# Altium PCB PCB_V0.0.PcbDoc
Units mm, origin at the board's own origin, x right, y up, seen from the top; angles counter-clockwise.
Board outline 105 x 34 mm, 2 copper layers (Top Layer, Bottom Layer); 26 components, 9 nets, 129 pads, 48 vias.
Unrouted connection lines stored in the file: 14.
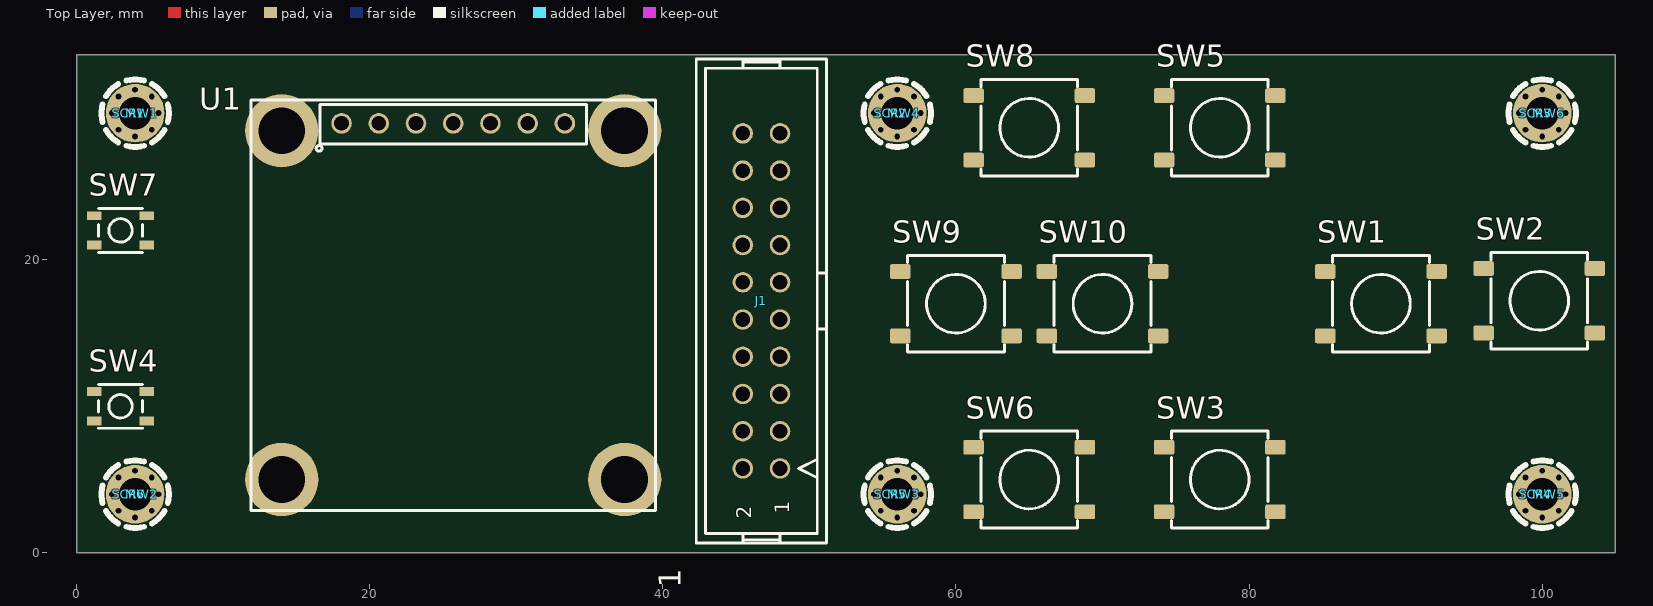
[diagram p0: Top Layer view]
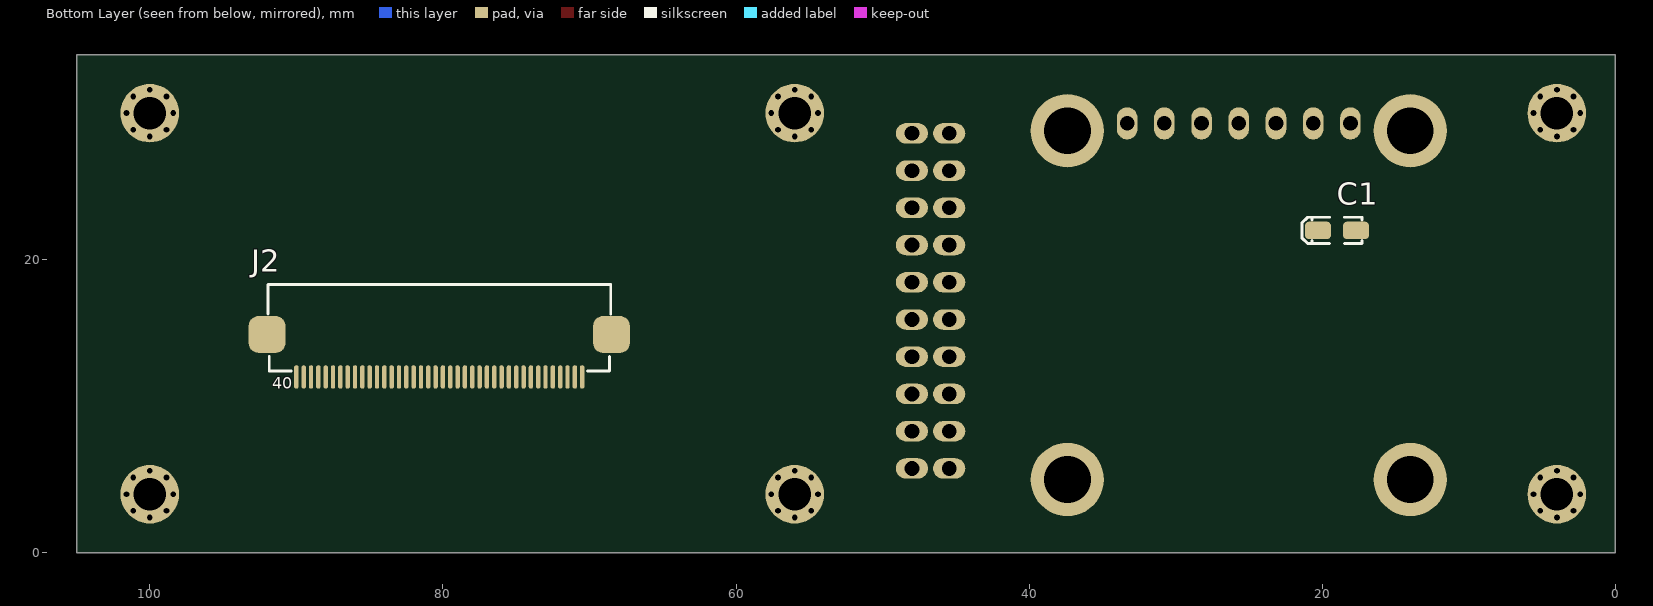
[diagram p1: Bottom Layer view, seen from below]

## Layer stack, top to bottom
Top Solder: solder mask 0.0102, Solder Resist, Dk 3.5
Top Layer: signal copper 0.0356
Dielectric 1: dielectric 0.32, FR-4, Dk 4.8
Bottom Layer: signal copper 0.0356
Bottom Solder: solder mask 0.0102, Solder Resist, Dk 3.5

## Board outline
0,0 0,34 105,34 105,0

## Design rules (kind name [scope] priority, off if disabled: settings)
Clearance [All] p1: gap=0.254 ignorepadtopadclearanceinfootprint=FALSE except(0: Arc-Hole Track-Hole SMDPad-Hole THPad-Hole Via-Hole Fill-Hole Poly-Hole Region-Hole Text-Hole)
PolygonConnect [All] p1: connectstyle=Relief reliefconductorwidth=0.254 reliefentries=4 polygonreliefangle="90 Angle" airgapwidth=0.254
RoutingVias [All] p1: holewidth=0.711 width=1.27 viastyle="Through Hole" minholewidth=0.711 minwidth=1.27 maxholewidth=0.711 maxwidth=1.27
SolderMaskExpansion [All] p1: expansion=0.102 istentingtop=FALSE
Width [All] p1: maxlimit=0.254 minlimit=0.254 preferedwidth=0.254
30 further rules are at their usual default settings.

## Classes and differential pairs
component class "screw and Hole": M1 M2 M3 M4 M5 M6 SCRW1 SCRW2 SCRW3 SCRW4 SCRW5 SCRW6
component class "On Board Terminal": J2
component class JTAG: J1
component class Disp: C1 SW1 SW2 SW5 SW6 SW8 SW10 U1

## Components (designator, comment, footprint, x,y, rotation, side; value= is the part's Value field where it differs from the comment)
C1 "2.2uF-10V" C_TN_3216 19,22 r180 bottom
J1 "IDC_2X10" IDC_2X10 46.73,17.19 r90 top
J2 "FPC50 40" FPC50_40 80.25,12 r180 bottom
M1 "DNP/MH" SCMH_M2 4,30 r0 top
M2 "DNP/MH" SCMH_M2 56,30 r0 top
M3 "DNP/MH" SCMH_M2 100,30 r0 top
M4 "DNP/MH" SCMH_M2 100,4 r0 top
M5 "DNP/MH" SCMH_M2 56,4 r0 top
M6 "DNP/MH" SCMH_M2 4,4 r0 top
SCRW1 "SCREW" SCRW_CHSH_PHLIPS_M2X4 4,30 r0 top
SCRW2 "SCREW" SCRW_CHSH_PHLIPS_M2X4 4,4 r0 top
SCRW3 "SCREW" SCRW_CHSH_PHLIPS_M2X4 56,4 r0 top
SCRW4 "SCREW" SCRW_CHSH_PHLIPS_M2X4 56,30 r0 top
SCRW5 "SCREW" SCRW_CHSH_PHLIPS_M2X4 100,4 r90 top
SCRW6 "SCREW" SCRW_CHSH_PHLIPS_M2X4 100,30 r90 top
SW1 "PUSHBUTTON" SWPBS_SPDT_6X6X4 89,17 r0 top
SW2 "PUSHBUTTON" SWPBS_SPDT_6X6X4 99.8,17.2 r0 top
SW3 "PUSHBUTTON" SWPBS_SPDT_6X6X4 78,5 r0 top
SW4 "PUSHBUTTON" SWPBS_SPDT_3X3TS 3,10 r0 top
SW5 "PUSHBUTTON" SWPBS_SPDT_6X6X4 78,29 r0 top
SW6 "PUSHBUTTON" SWPBS_SPDT_6X6X4 65,5 r0 top
SW7 "PUSHBUTTON" SWPBS_SPDT_3X3TS 3,22 r0 top
SW8 "PUSHBUTTON" SWPBS_SPDT_6X6X4 65,29 r0 top
SW9 "PUSHBUTTON" SWPBS_SPDT_6X6X4 60,17 r0 top
SW10 "PUSHBUTTON" SWPBS_SPDT_6X6X4 70,17 r0 top
U1 "OLED_SSD1306" OLED_SSD1306_64_SPI 25.702,29.3 r0 top

## Footprints (in the part's own frame and the unit in brackets; to place one, negate y for a bottom-side part, rotate by r counter-clockwise, add the part's x,y. Pads: shape width x height; smd on the part's side, far side on the other; paste and mask are expansions set on the pad)
C_TN_3216 [mm] "CAPACITOR, TAN A, 1206P, 3.2x1.6mm"
  rrect50% 1.8x1.2 smd mask+0.075: 1(-1.3,0) 2(1.3,0)
  Top Layer pour cut-out: -0.762,0.9 0.762,0.9 0.762,-0.9 -0.762,-0.9
  silkscreen extent -2.4,-0.9 1.7,0.9, body extent -1.7,-0.9 1.7,0.9, height 1.7
FPC50_40 [mm] "FPC, pitch: 0.5mm, FH12-40S-0.5SH, molex 54132-4062   (www.Smartw.ir)"
  oval 0.3x1.6 smd mask+0.05: 1(9.75,0) 2(9.25,0) 3(8.75,0) 4(8.25,0) 5(7.75,0) 6(7.25,0) 7(6.75,0) 8(6.25,0) 9(5.75,0) 10(5.25,0) 11(4.75,0) 12(4.25,0) 13(3.75,0) 14(3.25,0) 15(2.75,0) 16(2.25,0) 17(1.75,0) 18(1.25,0) 19(0.75,0) 20(0.25,0) 21(-0.25,0) 22(-0.75,0) 23(-1.25,0) 24(-1.75,0) 25(-2.25,0) 26(-2.75,0) 27(-3.25,0) 28(-3.75,0) 29(-4.25,0) 30(-4.75,0) 31(-5.25,0) 32(-5.75,0) 33(-6.25,0) 34(-6.75,0) 35(-7.25,0) 36(-7.75,0) 37(-8.25,0) 38(-8.75,0) 39(-9.25,0) 40(-9.75,0)
  rrect50% 2.5x2.5 smd: ""(-11.75,2.9) ""(11.75,2.9)
  silkscreen extent -11.7,0.4 11.7,6.3, body extent -12.05,-0.3 12.05,6.1, height 2.09
IDC_2X10 [mm]
  round 1.4 / inner round 1.4 / far side oval 1.4x2.2 hole 1 mask+0.1: 1(-11.43,-1.27) 2(-11.43,1.27) 3(-8.89,-1.27) 4(-8.89,1.27) 5(-6.35,-1.27) 6(-6.35,1.27) 7(-3.81,-1.27) 8(-3.81,1.27) 9(-1.27,-1.27) 10(-1.27,1.27) 11(1.27,-1.27) 12(1.27,1.27) 13(3.81,-1.27) 14(3.81,1.27) 15(6.35,-1.27) 16(6.35,1.27) 17(8.89,-1.27) 18(8.89,1.27) 19(11.43,-1.27) 20(11.43,1.27)
  silkscreen extent -16.51,-4.45 16.51,4.45, body extent -16.53,-4.42 16.53,4.75, height 9.13
OLED_SSD1306_64_SPI [mm] "OLED SS1306 Breakout, 128X64, SPI"
  round 1.4 / inner round 1.4 / far side oval 1.4x2.2 hole 1 mask+0.1: 1(-7.62,0) 2(-5.08,0) 3(-2.54,0) 4(0,0) 5(2.54,0) 6(5.08,0) 7(7.62,0)
  round 5 hole 3.2: ""(-11.702,-24.3) ""(-11.702,-0.5) ""(11.698,-24.3) ""(11.698,-0.5)
  silkscreen extent -13.8,-26.4 13.8,1.6, body extent -13.7,-26.3 13.7,1.5, height 13.92
SCMH_M2 [mm] "SCREW mouting, M2, 2.0mm diameter and 4.0mm PanHead"
  round 4 / inner round 2.5 / far side round 4 hole 2.2 mask+0.1: 1(0,0)
  Top Layer pour cut-out: 0,2.5 -0.957,2.31 -1.768,1.768 -2.31,0.957 -2.5,0 -2.5,0 -2.31,-0.957 -1.768,-1.768 -0.957,-2.31 0,-2.5 0,-2.5 1.25,-2.165 2.165,-1.25 2.5,0 2.5,0 2.31,0.957 1.768,1.768 0.957,2.31 0,2.5
  Bottom Layer pour cut-out: 0,2.5 -0.957,2.31 -1.768,1.768 -2.31,0.957 -2.5,0 -2.5,0 -2.31,-0.957 -1.768,-1.768 -0.957,-2.31 0,-2.5 0,-2.5 1.25,-2.165 2.165,-1.25 2.5,0 2.5,0 2.31,0.957 1.768,1.768 0.957,2.31 0,2.5
  silkscreen extent -2.3,-2.3 2.3,2.3
SCRW_CHSH_PHLIPS_M2X4 [mm] "SCREW, M3, 2.0mm diameter and 4.0mm, CheaseHead, Phillips, 4mm length"
  body extent -2,-2 2,2, height 1.73
SWPBS_SPDT_3X3TS [mm] "SWITCH, PUSHBUTTON, SMD, SPDT, 3.1x3.1x1.5mm, TS-1233"
  rect 1x0.6 smd: 1(-1.8,1) 2(-1.8,-1) 3(1.8,-1) 4(1.8,1)
  silkscreen extent -1.5,-1.5 1.5,1.5, body extent -2,-1.5 2,1.5, height 1.5
SWPBS_SPDT_6X6X4 [mm] "SWITCH, PUSHBUTTON, SMD, SPDT, 6.5x6.5mm, 4.3mm, TS-1143S"
  round 0.508 on Mech15 mask+0.1: 0(0,0)
  rrect25% 1.4x1 smd mask+0.1: 1(-3.8,2.2) 2(-3.8,-2.2) 3(3.8,-2.2) 4(3.8,2.2)
  silkscreen extent -3.3,-3.3 3.3,3.3, body extent -4,-3.25 4,3.25, height 4.3

## Part data
C1: library part CAP_SMD_TAN, "CAP, SMD, TAN,", PARAM2=-V
J1: "CONN, IDC, Male, pitch: 2.54mm, 20POS"
J2: "CONN, FPC, 0.50mm pitch, RightAngle, Bot. Contact", ComponentLink1Description="Website Smart World", ComponentLink1URL=https://www.smartw.ir/, ComponentLink2Description=Telegram, ComponentLink2URL=https://t.me/altium_smartw, ComponentLink3Description=Instagram, ComponentLink3URL=https://Instagram.com/smartgw.ir, DatasheetVersion=2021
M1 M2 M3 M4 M5 M6: library part SCMH_M2, "SCREW mouting, M2, 2.0mm diameter and 4.0mm PanHead", ASSEMBLY=DNP
SCRW1 SCRW2 SCRW3 SCRW4 SCRW5 SCRW6: library part SCRW_CHSH_PHLIPS_M2X4, "SCREW, M2, 2.0mm diameter and 4.0mm PanHead", ASSEMBLY=DNP
SW1 SW2 SW3 SW5 SW6 SW8 SW9 SW10: library part SWPBS_SPDT_6X6X4, "SWITCH, PUSH BUTTON, TACTILE, SMD, SPDT, 6X6X4.3mm", ASSEMBLY=ASSEMBLY, DESC=DESCRIPTION, MANF=Bond-Tact, MANF_P#=TS-1143S, PARAM=PARAM, PRICE=PRICE
SW4 SW7: library part SWPBS_SPDT_3X3TS, "SWITCH, PUSH BUTTON, TACTILE, SMD, SPDT, 3X3MM", ASSEMBLY=ASSEMBLY, DESC=DESCRIPTION, MANF=CHINA, MANF_P#=TS-1233, PARAM=PARAM, PRICE="1000= 5$"
U1: library part OLED_SSD1306_64_SPI, "OLED, SSD1306, 0.96\", 128X64, BREAKOUT SPI", MANF=-, MANF_P#=OLED_SSD1306_I2C, PARAM="2 Colors, 0.96\", 128X64", PARAM2="3.3/5VCC, -20~70oC"

## Via types
v1: diameter 0.6, hole 0.4, Top Layer to Bottom Layer, 48 vias

## Nets (pads, with @x,y where several pads share a name; then routed paths per layer and width w, separated by ;. In a path a pad name is that pad's centre, name@x,y a point inside that pad or via, vN(x,y) a via of type N, cw(c..) or ccw(c..) an arc to the next point about the centre after c; other vN are vias at no path point)
+3V3_Main: C1.1 J2.40 U1.2
CS_DISP: J2.6 U1.7
DC_DISP: J2.5 U1.6
GND: C1.2 J2.1 U1.1
MOSI_DISP: J2.3 U1.4
RES_DISP: J2.4 U1.5
RES_SW: J2.8
SCK_DISP: J2.2 U1.3
SHILED: M1.1 M2.1 M3.1 M4.1 M5.1 M6.1
  other v1: 4,2.4 56,2.4 100,2.4 2.869,2.869 5.131,2.869 54.869,2.869 57.131,2.869 98.869,2.869 101.131,2.869 2.4,4 5.6,4 54.4,4 57.6,4 98.4,4 101.6,4 2.869,5.131 5.131,5.131 54.869,5.131 57.131,5.131 98.869,5.131 101.131,5.131 4,5.6 56,5.6 100,5.6 4,28.4 56,28.4 100,28.4 2.869,28.869 5.131,28.869 54.869,28.869 57.131,28.869 98.869,28.869 101.131,28.869 2.4,30 5.6,30 54.4,30 57.6,30 98.4,30 101.6,30 2.869,31.131 5.131,31.131 54.869,31.131 57.131,31.131 98.869,31.131 101.131,31.131 4,31.6 56,31.6 100,31.6
pads on no net: J1.1 J1.2 J1.3 J1.4 J1.5 J1.6 J1.7 J1.8 J1.9 J1.10 J1.11 J1.12 J1.13 J1.14 J1.15 J1.16 J1.17 J1.18 J1.19 J1.20 J2. J2.7 J2.9 J2.10 J2.11 J2.12 J2.13 J2.14 J2.15 J2.16 J2.17 J2.18 J2.19 J2.20 J2.21 J2.22 J2.23 J2.24 J2.25 J2.26 J2.27 J2.28 J2.29 J2.30 J2.31 J2.32 J2.33 J2.34 J2.35 J2.36 J2.37 J2.38 J2.39 SW1.0 SW1.1 SW1.2 SW1.3 SW1.4 SW2.0 SW2.1 SW2.2 SW2.3 SW2.4 SW3.0 SW3.1 SW3.2 SW3.3 SW3.4 SW4.1 SW4.2 SW4.3 SW4.4 SW5.0 SW5.1 SW5.2 SW5.3 SW5.4 SW6.0 SW6.1 SW6.2 SW6.3 SW6.4 SW7.1 SW7.2 SW7.3 SW7.4 SW8.0 SW8.1 SW8.2 SW8.3 SW8.4 SW9.0 SW9.1 SW9.2 SW9.3 SW9.4 SW10.0 SW10.1 SW10.2 SW10.3 SW10.4 U1.

## Text inside footprints (layer, text, board x,y; h text height)
J1: Top Overlay "1" at 48.635,2.661 h1 r90; Top Overlay "2" at 46.044,2.331 h1 r90
J2: Bottom Overlay "40" at 91.65,11.2 h0.8